# Altium PCB AX309.REV.1.0.PcbDoc (part 8 of 10)
Units mil, origin at the board's own origin, x right, y up, seen from the top; angles counter-clockwise.
Board outline 5185 x 3614 mil, 4 copper layers (Top Layer, GND, Mid-Layer 1, Bottom Layer); 191 components, 352 nets, 1106 pads, 425 vias.
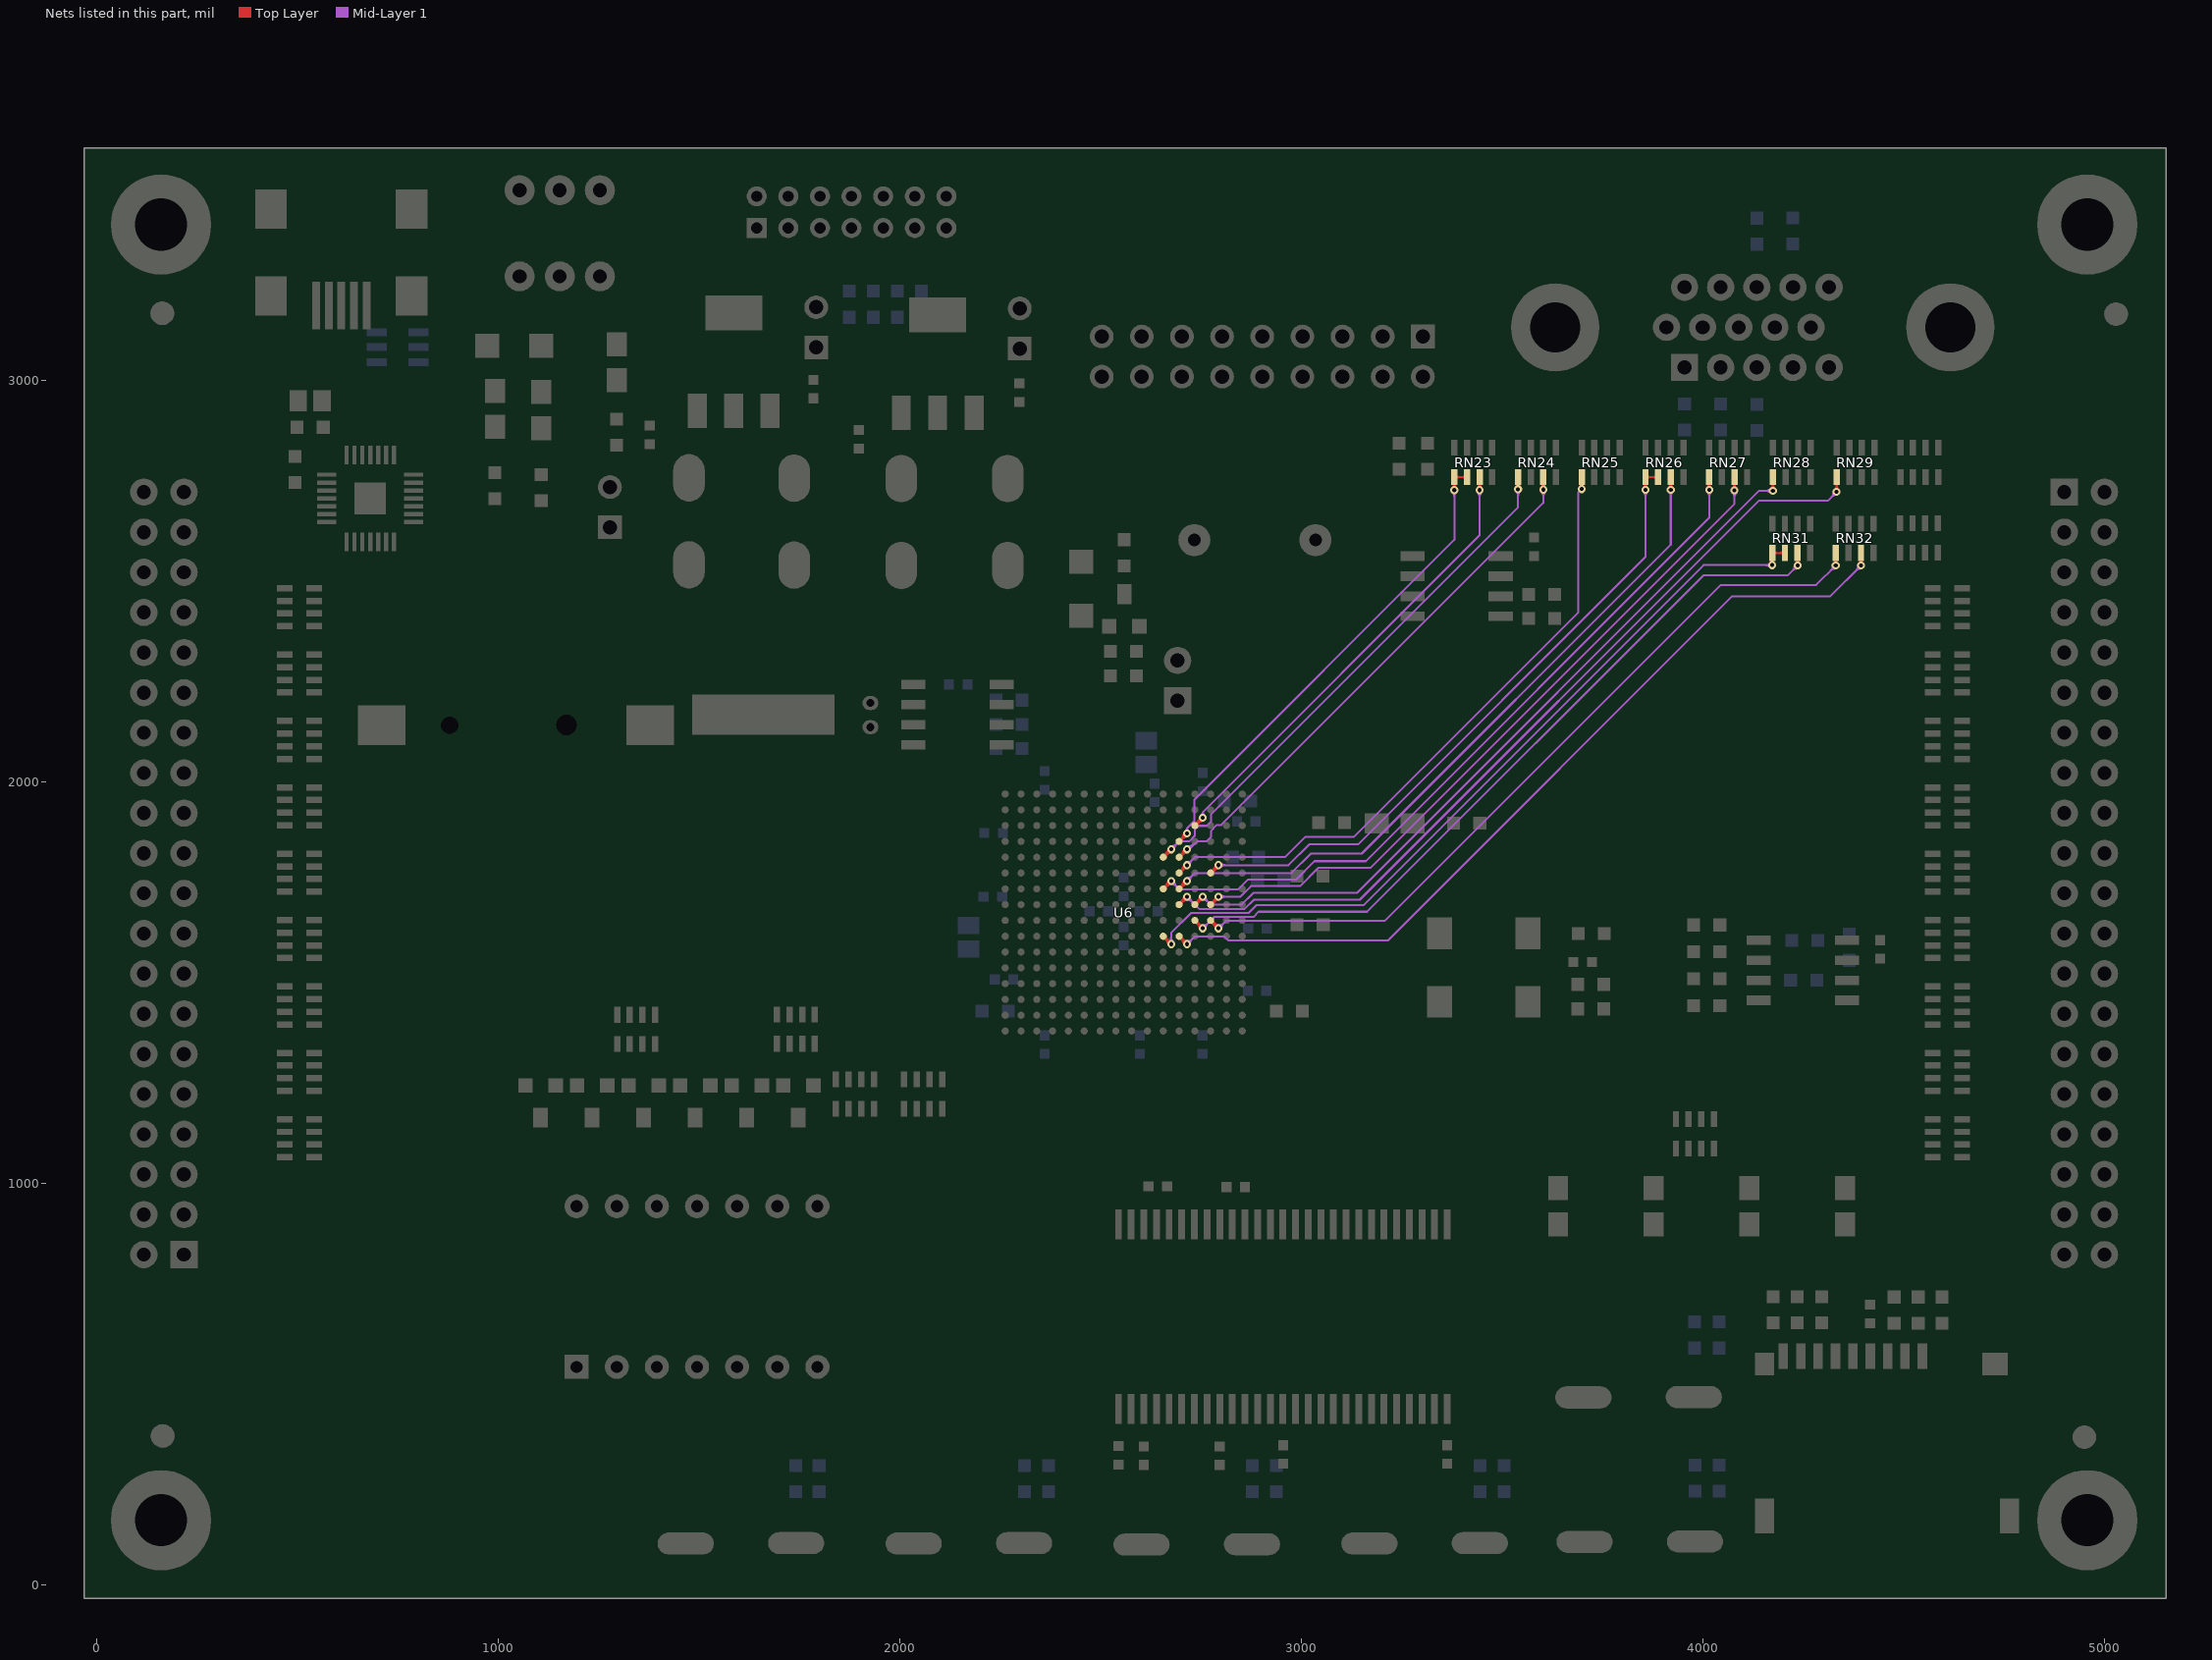
[diagram p10: the nets of this part, all layers, seen from the top]

## Via types
v1: diameter 20, hole 10, Top Layer to Bottom Layer, 328 vias
v2: diameter 30, hole 15, Top Layer to Bottom Layer, 95 vias
v3: diameter 40, hole 20, Top Layer to Bottom Layer, 2 vias

## Nets (pads, with @x,y where several pads share a name; then routed paths per layer and width w, separated by ;. In a path a pad name is that pad's centre, name@x,y a point inside that pad or via, vN(x,y) a via of type N, cw(c..) or ccw(c..) an arc to the next point about the centre after c; other vN are vias at no path point) (continued)
VGAD1: RN32.7 U6.M7 | length 2410.8
  Top Layer w5: U6.M7@2695.8,1608.59 cw(c2695.8,1593.24) 2706.65,1604.09 cw(c2717.5,1614.94) U6.M7@2702.15,1614.94 ; U6.M7@2695.8,1614.94 v1(2715.48,1595.26) ; U6.M7@2698.15,1609 cw(c2688.07,1591.54) v1@2708.05,1594.25 ; U6.M7@2701.74,1612.59 ccw(c2719.2,1622.67) v1@2716.49,1602.69 ; 2705.03,1605.02 cw(c2701.58,1599.04) v1@2708.24,1597.23 ; 2705.72,1605.71 ccw(c2711.7,1609.16) v1@2713.51,1602.5 ; 2706.84,1603.76 ccw(c2717.47,1609.9) v1@2715.82,1597.74 ; 2706.98,1603.9 cw(c2700.84,1593.27) v1@2713,1594.92 ; v1@2707.98,1595.26 ccw(c2689.87,1595.26) 2702.68,1608.06 ccw(c2715.48,1620.87) v1@2715.48,1602.76 ; v1@4389.2,2543.8 ccw(c4376.4,2556.6) 4394.5,2556.6 ccw(c4412.61,2556.6) v1@4399.81,2543.8 ; RN32.7@4390.7,2554.24 cw(c4381.53,2545.07) 4394.5,2545.07 cw(c4407.48,2545.07) RN32.7@4398.3,2554.24 ; v1@4391.89,2545.52 ccw(c4390.96,2548.02) 4393.53,2548.71 ccw(c4397.61,2549.8) v1@4396.49,2545.73 ; v1@4392.52,2545.73 ccw(c4391.4,2549.8) 4395.48,2548.71 ccw(c4398.05,2548.02) v1@4397.12,2545.52 ; v1(4394.5,2538.5) RN32.7@4394.5,2569.85 ; 2707.53,1602.56 cw(c2701.41,1599.03) 2708.24,1597.2 ccw(c2701.41,1599.03) 2707.53,1602.56 ; 2708.18,1603.21 ccw(c2711.71,1609.33) 2713.54,1602.5 cw(c2711.71,1609.33) 2708.18,1603.21
  Mid-Layer 1 w5: v1(2715.48,1595.26) 2734.22,1614 2809,1614 2818,1605 3217,1605 4074,2462 4318.01,2462 v1(4394.5,2538.5) ; v1@2715.48,1602.76 ccw(c2715.48,1620.87) 2728.28,1608.06 ccw(c2741.09,1595.26) v1@2722.98,1595.26 ; v1@4387,2538.5 cw(c4368.9,2538.5) 4381.7,2525.69 cw(c4394.5,2512.89) v1@4394.5,2531
VGAD2: RN32.5 U6.P8 | length 2245.3
  Top Layer w5: U6.P8@2774.54,1647.96 cw(c2774.54,1632.61) 2785.39,1643.46 cw(c2796.24,1654.32) U6.P8@2780.89,1654.32 ; U6.P8@2774.54,1654.32 v1(2794.22,1634.63) ; U6.P8@2776.89,1648.37 cw(c2766.81,1630.91) v1@2786.79,1633.62 ; U6.P8@2780.48,1651.96 ccw(c2797.94,1662.04) v1@2795.23,1642.06 ; 2783.77,1644.39 cw(c2780.32,1638.41) v1@2786.98,1636.6 ; 2784.46,1645.08 ccw(c2790.44,1648.53) v1@2792.25,1641.87 ; 2785.58,1643.13 ccw(c2796.21,1649.27) v1@2794.56,1637.11 ; 2785.72,1643.27 cw(c2779.58,1632.64) v1@2791.74,1634.29 ; v1@2786.72,1634.63 ccw(c2768.61,1634.63) 2781.42,1647.43 ccw(c2794.22,1660.24) v1@2794.22,1642.13 ; v1@4326.21,2543.79 ccw(c4313.41,2556.59) 4331.51,2556.59 ccw(c4349.62,2556.59) v1@4336.82,2543.79 ; RN32.5@4327.71,2554.24 cw(c4318.54,2545.07) 4331.51,2545.07 cw(c4344.49,2545.07) RN32.5@4335.31,2554.24 ; v1@4328.89,2545.52 ccw(c4327.96,2548.01) 4330.54,2548.7 ccw(c4334.62,2549.8) v1@4333.5,2545.72 ; v1@4329.52,2545.72 ccw(c4328.4,2549.8) 4332.49,2548.7 ccw(c4335.06,2548.01) v1@4334.13,2545.52 ; v1(4331.51,2538.49) RN32.5@4331.51,2569.85 ; 2786.27,1641.93 cw(c2780.15,1638.4) 2786.98,1636.57 ccw(c2780.15,1638.4) 2786.27,1641.93 ; 2786.92,1642.58 ccw(c2790.45,1648.7) 2792.28,1641.87 cw(c2790.45,1648.7) 2786.92,1642.58
  Mid-Layer 1 w5: v1(2794.22,1634.63) 2812.59,1653 3208,1653 4045,2490 4283.02,2490 v1(4331.51,2538.49) ; v1@2794.22,1642.13 ccw(c2794.22,1660.24) 2807.02,1647.43 ccw(c2819.83,1634.63) v1@2801.72,1634.63 ; v1@4324.01,2538.49 cw(c4305.91,2538.49) 4318.71,2525.68 cw(c4331.51,2512.88) v1@4331.51,2530.99
VGAD3: RN31.7 U6.N8 | length 2189.7
  Top Layer w5: U6.N8@2735.17,1647.96 cw(c2735.17,1632.61) 2746.02,1643.46 cw(c2756.87,1654.32) U6.N8@2741.52,1654.32 ; U6.N8@2735.17,1654.32 v1(2754.85,1634.63) ; U6.N8@2737.52,1648.37 cw(c2727.44,1630.91) v1@2747.42,1633.62 ; U6.N8@2741.11,1651.96 ccw(c2758.57,1662.04) v1@2755.86,1642.06 ; 2744.4,1644.39 cw(c2740.95,1638.41) v1@2747.61,1636.6 ; 2745.09,1645.08 ccw(c2751.07,1648.53) v1@2752.88,1641.87 ; 2746.21,1643.13 ccw(c2756.84,1649.27) v1@2755.19,1637.11 ; 2746.35,1643.27 cw(c2740.21,1632.64) v1@2752.37,1634.29 ; v1@2747.35,1634.63 ccw(c2729.24,1634.63) 2742.05,1647.43 ccw(c2754.85,1660.24) v1@2754.85,1642.13 ; v1@4231.2,2543.8 ccw(c4218.4,2556.6) 4236.5,2556.6 ccw(c4254.61,2556.6) v1@4241.81,2543.8 ; RN31.7@4232.7,2554.24 cw(c4223.53,2545.07) 4236.5,2545.07 cw(c4249.48,2545.07) RN31.7@4240.3,2554.24 ; v1@4233.89,2545.52 ccw(c4232.96,2548.02) 4235.53,2548.71 ccw(c4239.61,2549.8) v1@4238.49,2545.73 ; v1@4234.52,2545.73 ccw(c4233.4,2549.8) 4237.48,2548.71 ccw(c4240.05,2548.02) v1@4239.12,2545.52 ; v1(4236.5,2538.5) RN31.7@4236.5,2569.85 ; v1@2752.91,1641.87 cw(c2751.08,1648.7) 2747.55,1642.58 ccw(c2751.08,1648.7) v1@2752.91,1641.87 ; 2746.9,1641.93 cw(c2740.78,1638.4) 2747.61,1636.57 ccw(c2740.78,1638.4) 2746.9,1641.93
  Mid-Layer 1 w5: v1(2754.85,1634.63) 2783.22,1663 2881,1663 2894,1676 3164,1676 4002,2514 4212.01,2514 v1(4236.5,2538.5) ; v1@2754.85,1642.13 ccw(c2754.85,1660.24) 2767.65,1647.43 ccw(c2780.46,1634.63) v1@2762.35,1634.63 ; v1@4229,2538.5 cw(c4210.9,2538.5) 4223.7,2525.69 cw(c4236.5,2512.89) v1@4236.5,2531
VGAD4: RN31.5 RN31.6 U6.L7 | length 2293.1
  Top Layer w5: U6.L7@2656.43,1608.59 cw(c2656.43,1593.24) 2667.28,1604.09 cw(c2678.13,1614.94) U6.L7@2662.78,1614.94 ; U6.L7@2656.43,1614.94 v1(2676.11,1595.26) ; U6.L7@2658.78,1609 cw(c2648.7,1591.54) v1@2668.68,1594.25 ; U6.L7@2662.37,1612.59 ccw(c2679.83,1622.67) v1@2677.12,1602.69 ; 2665.66,1605.02 cw(c2662.21,1599.04) v1@2668.87,1597.23 ; 2666.35,1605.71 ccw(c2672.33,1609.16) v1@2674.14,1602.5 ; 2667.47,1603.76 ccw(c2678.1,1609.9) v1@2676.45,1597.74 ; 2667.61,1603.9 cw(c2661.47,1593.27) v1@2673.63,1594.92 ; v1@2668.61,1595.26 ccw(c2650.5,1595.26) 2663.31,1608.06 ccw(c2676.11,1620.87) v1@2676.11,1602.76 ; v1@4168.21,2544.79 ccw(c4155.41,2557.59) 4173.51,2557.59 ccw(c4191.62,2557.59) v1@4178.82,2544.79 ; RN31.5@4169.71,2554.24 cw(c4160.54,2545.07) 4173.51,2545.07 cw(c4186.49,2545.07) RN31.5@4177.31,2554.24 ; v1(4173.51,2539.49) RN31.5@4173.51,2569.85 RN31.6@4205.01,2569.85 ; RN31.5@4177.31,2566.05 cw(c4186.49,2556.88) 4186.49,2569.85 cw(c4186.49,2582.82) RN31.5@4177.31,2573.65 ; RN31.6@4201.21,2566.05 ccw(c4192.03,2556.88) 4192.03,2569.85 ccw(c4192.03,2582.82) RN31.6@4201.21,2573.65 ; v1@2674.17,1602.5 cw(c2672.34,1609.33) 2668.81,1603.21 ccw(c2672.34,1609.33) v1@2674.17,1602.5 ; 2668.16,1602.56 cw(c2662.04,1599.03) 2668.87,1597.2 ccw(c2662.04,1599.03) 2668.16,1602.56
  Mid-Layer 1 w5: v1@2670.81,1600.56 ccw(c2658,1613.37) 2676.11,1613.37 ccw(c2694.22,1613.37) v1@2681.41,1600.56 ; v1(2676.11,1595.26) 2676.11,1623.11 2726,1673 2869,1673 2888,1692 3155,1692 4002.49,2539.49 v1(4173.51,2539.49) ; v1@4168.21,2534.18 ccw(c4155.41,2521.38) 4155.41,2539.49 ccw(c4155.41,2557.59) v1@4168.21,2544.79
VGAD5: RN29.5 U6.M9 | length 2383.6
  Top Layer w5: U6.M9@2695.8,1693.68 v1(2715.48,1713.37) ; U6.M9@2695.8,1700.04 ccw(c2695.8,1715.39) 2706.65,1704.54 ccw(c2717.5,1693.68) U6.M9@2702.15,1693.68 ; U6.M9@2698.15,1699.63 ccw(c2688.07,1717.09) v1@2708.05,1714.38 ; U6.M9@2701.74,1696.04 cw(c2719.2,1685.96) v1@2716.49,1705.94 ; 2705.03,1703.61 ccw(c2701.58,1709.59) v1@2708.24,1711.4 ; 2705.72,1702.92 cw(c2711.7,1699.47) v1@2713.51,1706.13 ; 2706.84,1704.87 cw(c2717.47,1698.73) v1@2715.82,1710.89 ; 2706.98,1704.73 ccw(c2700.84,1715.36) v1@2713,1713.71 ; v1@2707.98,1713.37 cw(c2689.87,1713.37) 2702.68,1700.57 cw(c2715.48,1687.76) v1@2715.48,1705.87 ; v1@4328.49,2727.51 ccw(c4315.69,2740.31) 4333.8,2740.31 ccw(c4351.9,2740.31) v1@4339.1,2727.51 ; RN29.5@4330,2743.24 cw(c4320.82,2734.07) 4333.8,2734.07 cw(c4346.77,2734.07) RN29.5@4337.6,2743.24 ; v1(4333.8,2722.2) RN29.5@4333.8,2758.85 ; 2707.53,1706.07 ccw(c2701.41,1709.6) 2708.24,1711.43 cw(c2701.41,1709.6) 2707.53,1706.07 ; 2708.18,1705.42 cw(c2711.71,1699.3) 2713.54,1706.13 ccw(c2711.71,1699.3) 2708.18,1705.42
  Mid-Layer 1 w5: v1@2715.48,1705.87 cw(c2715.48,1687.76) 2728.28,1700.57 cw(c2741.09,1713.37) v1@2722.98,1713.37 ; v1(2715.48,1713.37) 2745.85,1683 2859,1683 2882,1706 3146,1706 4140,2700 4311.59,2700 v1(4333.8,2722.2) ; v1@4326.3,2722.2 cw(c4308.19,2722.2) 4320.99,2709.4 cw(c4333.8,2696.6) v1@4333.8,2714.7
VGAD6: RN28.5 U6.N9 | length 2199.6
  Top Layer w5: U6.N9@2735.17,1693.68 v1(2754.85,1713.37) ; U6.N9@2735.17,1700.04 ccw(c2735.17,1715.39) 2746.02,1704.54 ccw(c2756.87,1693.68) U6.N9@2741.52,1693.68 ; U6.N9@2737.52,1699.63 ccw(c2727.44,1717.09) v1@2747.42,1714.38 ; U6.N9@2741.11,1696.04 cw(c2758.57,1685.96) v1@2755.86,1705.94 ; 2744.4,1703.61 ccw(c2740.95,1709.59) v1@2747.61,1711.4 ; 2745.09,1702.92 cw(c2751.07,1699.47) v1@2752.88,1706.13 ; 2746.21,1704.87 cw(c2756.84,1698.73) v1@2755.19,1710.89 ; 2746.35,1704.73 ccw(c2740.21,1715.36) v1@2752.37,1713.71 ; v1@2747.35,1713.37 cw(c2729.24,1713.37) 2742.05,1700.57 cw(c2754.85,1687.76) v1@2754.85,1705.87 ; v1@4169.78,2730.22 ccw(c4156.98,2743.02) 4175.08,2743.02 ccw(c4193.19,2743.02) v1@4180.39,2730.22 ; RN28.5@4171.28,2743.24 cw(c4162.11,2734.07) 4175.08,2734.07 cw(c4188.06,2734.07) RN28.5@4178.88,2743.24 ; v1@4171.71,2731.62 ccw(c4168.19,2738.62) 4175.76,2736.59 ccw(c4179.7,2735.54) v1@4178.07,2731.8 ; v1@4172.09,2731.8 ccw(c4170.47,2735.54) 4174.41,2736.59 ccw(c4181.98,2738.62) v1@4178.45,2731.62 ; v1(4175.08,2724.92) RN28.5@4175.08,2758.85 ; v1@2752.91,1706.13 ccw(c2751.08,1699.3) 2747.55,1705.42 cw(c2751.08,1699.3) v1@2752.91,1706.13 ; 2746.9,1706.07 ccw(c2740.78,1709.6) 2747.61,1711.43 cw(c2740.78,1709.6) 2746.9,1706.07
  Mid-Layer 1 w5: v1@2754.85,1705.87 cw(c2754.85,1687.76) 2767.65,1700.57 cw(c2780.46,1713.37) v1@2762.35,1713.37 ; v1(2754.85,1713.37) 2774.22,1694 2852,1694 2881,1723 3139,1723 4140.92,2724.92 v1(4175.08,2724.92) ; v1@4169.78,2719.61 ccw(c4156.98,2706.81) 4156.98,2724.92 ccw(c4156.98,2743.02) v1@4169.78,2730.22
VGAD7: RN27.7 U6.P9 | length 2065.3
  Top Layer w5: U6.P9@2774.54,1693.68 v1(2794.22,1713.37) ; U6.P9@2774.54,1700.04 ccw(c2774.54,1715.39) 2785.39,1704.54 ccw(c2796.24,1693.68) U6.P9@2780.89,1693.68 ; U6.P9@2776.89,1699.63 ccw(c2766.81,1717.09) v1@2786.79,1714.38 ; U6.P9@2780.48,1696.04 cw(c2797.94,1685.96) v1@2795.23,1705.94 ; 2783.77,1703.61 ccw(c2780.32,1709.59) v1@2786.98,1711.4 ; 2784.46,1702.92 cw(c2790.44,1699.47) v1@2792.25,1706.13 ; 2785.58,1704.87 cw(c2796.21,1698.73) v1@2794.56,1710.89 ; 2785.72,1704.73 ccw(c2779.58,1715.36) v1@2791.74,1713.71 ; v1@2786.72,1713.37 cw(c2768.61,1713.37) 2781.42,1700.57 cw(c2794.22,1687.76) v1@2794.22,1705.87 ; v1@4074.06,2730.94 ccw(c4061.25,2743.75) 4079.36,2743.75 ccw(c4097.47,2743.75) v1@4084.66,2730.94 ; RN27.7@4075.56,2743.24 cw(c4066.39,2734.07) 4079.36,2734.07 cw(c4092.33,2734.07) RN27.7@4083.16,2743.24 ; v1@4076.35,2732.51 ccw(c4073.66,2738.64) 4080.12,2736.9 ccw(c4083.67,2735.95) v1@4082.25,2732.56 ; v1@4076.47,2732.56 ccw(c4075.05,2735.95) 4078.6,2736.9 ccw(c4085.07,2738.64) v1@4082.38,2732.51 ; v1(4079.36,2725.64) RN27.7@4079.36,2758.85 ; 2786.27,1706.07 ccw(c2780.15,1709.6) 2786.98,1711.43 cw(c2780.15,1709.6) 2786.27,1706.07 ; 2786.92,1705.42 cw(c2790.45,1699.3) 2792.28,1706.13 ccw(c2790.45,1699.3) 2786.92,1705.42
  Mid-Layer 1 w5: v1(2794.22,1713.37) 2848.37,1713.37 2875,1740 2997,1740 3042,1785 3172,1785 4079.36,2692.36 v1(4079.36,2725.64) ; v1@2799.52,1708.07 cw(c2812.33,1695.26) 2812.33,1713.37 cw(c2812.33,1731.48) v1@2799.52,1718.67 ; v1@4074.06,2720.34 cw(c4061.25,2707.53) 4079.36,2707.53 cw(c4097.47,2707.53) v1@4084.66,2720.34
VGAD8: RN27.5 U6.L10 | length 2136.3
  Top Layer w5: U6.L10@2656.43,1733.06 v1(2676.11,1752.74) ; U6.L10@2656.43,1739.41 ccw(c2656.43,1754.76) 2667.28,1743.91 ccw(c2678.13,1733.06) U6.L10@2662.78,1733.06 ; U6.L10@2658.78,1739 ccw(c2648.7,1756.46) v1@2668.68,1753.75 ; U6.L10@2662.37,1735.41 cw(c2679.83,1725.33) v1@2677.12,1745.31 ; 2665.66,1742.98 ccw(c2662.21,1748.96) v1@2668.87,1750.77 ; 2666.35,1742.29 cw(c2672.33,1738.84) v1@2674.14,1745.5 ; 2667.47,1744.24 cw(c2678.1,1738.1) v1@2676.45,1750.26 ; 2667.61,1744.1 ccw(c2661.47,1754.73) v1@2673.63,1753.08 ; v1@2668.61,1752.74 cw(c2650.5,1752.74) 2663.31,1739.94 cw(c2676.11,1727.13) v1@2676.11,1745.24 ; v1@4011.07,2732.67 ccw(c3998.26,2745.48) 4016.37,2745.48 ccw(c4034.48,2745.48) v1@4021.67,2732.67 ; RN27.5@4012.57,2743.24 cw(c4003.39,2734.07) 4016.37,2734.07 cw(c4029.34,2734.07) RN27.5@4020.17,2743.24 ; v1@4013.73,2734.39 ccw(c4012.77,2736.95) 4015.41,2737.65 ccw(c4019.63,2738.78) v1@4018.43,2734.58 ; v1@4014.31,2734.58 ccw(c4013.11,2738.78) 4017.33,2737.65 ccw(c4019.97,2736.95) v1@4019.01,2734.39 ; v1(4016.37,2727.37) RN27.5@4016.37,2758.85 ; v1@2674.17,1745.5 ccw(c2672.34,1738.67) 2668.81,1744.79 cw(c2672.34,1738.67) v1@2674.17,1745.5 ; 2668.16,1745.44 ccw(c2662.04,1748.97) 2668.87,1750.8 cw(c2662.04,1748.97) 2668.16,1745.44
  Mid-Layer 1 w5: v1@2676.11,1745.24 cw(c2676.11,1727.13) 2688.91,1739.94 cw(c2701.72,1752.74) v1@2683.61,1752.74 ; v1(2676.11,1752.74) 2696.85,1732 2843,1732 2867,1756 2987,1756 3033,1802 3161,1802 4016.37,2657.37 v1(4016.37,2727.37) ; v1@4011.07,2722.07 cw(c3998.26,2709.26) 4016.37,2709.26 cw(c4034.48,2709.26) v1@4021.67,2722.07
VGAD9: RN26.7 U6.M10 | length 2023.2
  Top Layer w5: U6.M10@2695.8,1733.06 v1(2715.48,1752.74) ; U6.M10@2695.8,1739.41 ccw(c2695.8,1754.76) 2706.65,1743.91 ccw(c2717.5,1733.06) U6.M10@2702.15,1733.06 ; U6.M10@2698.15,1739 ccw(c2688.07,1756.46) v1@2708.05,1753.75 ; U6.M10@2701.74,1735.41 cw(c2719.2,1725.33) v1@2716.49,1745.31 ; 2705.03,1742.98 ccw(c2701.58,1748.96) v1@2708.24,1750.77 ; 2705.72,1742.29 cw(c2711.7,1738.84) v1@2713.51,1745.5 ; 2706.84,1744.24 cw(c2717.47,1738.1) v1@2715.82,1750.26 ; 2706.98,1744.1 ccw(c2700.84,1754.73) v1@2713,1753.08 ; v1@2707.98,1752.74 cw(c2689.87,1752.74) 2702.68,1739.94 cw(c2715.48,1727.13) v1@2715.48,1745.24 ; v1@3915.34,2732.66 ccw(c3902.54,2745.46) 3920.65,2745.46 ccw(c3938.75,2745.46) v1@3925.95,2732.66 ; RN26.7@3916.85,2743.24 cw(c3907.67,2734.07) 3920.65,2734.07 cw(c3933.62,2734.07) RN26.7@3924.45,2743.24 ; v1@3918.01,2734.37 ccw(c3917.04,2736.94) 3919.69,2737.65 ccw(c3923.93,2738.78) v1@3922.72,2734.56 ; v1@3918.58,2734.56 ccw(c3917.37,2738.78) 3921.61,2737.65 ccw(c3924.25,2736.94) v1@3923.29,2734.37 ; v1(3920.65,2727.35) RN26.7@3920.65,2758.85 ; 2707.53,1745.44 ccw(c2701.41,1748.97) 2708.24,1750.8 cw(c2701.41,1748.97) 2707.53,1745.44 ; 2708.18,1744.79 cw(c2711.71,1738.67) 2713.54,1745.5 ccw(c2711.71,1738.67) 2708.18,1744.79
  Mid-Layer 1 w5: v1(2715.48,1752.74) 2735.17,1772.43 2774.54,1772.43 2975.43,1772.43 3024,1821 3151,1821 3920.65,2590.65 v1(3920.65,2727.35) ; v1@2715.48,1760.24 ccw(c2715.48,1778.35) 2728.28,1765.54 ccw(c2741.09,1752.74) v1@2722.98,1752.74 ; v1@3915.34,2722.05 cw(c3902.54,2709.25) 3920.65,2709.25 cw(c3938.75,2709.25) v1@3925.95,2722.05
VGAD10: RN26.5 RN26.6 U6.P11 | length 1961.1
  Top Layer w5: U6.P11@2774.54,1772.43 v1(2794.22,1792.11) ; U6.P11@2774.54,1778.78 ccw(c2774.54,1794.13) 2785.39,1783.28 ccw(c2796.24,1772.43) U6.P11@2780.89,1772.43 ; U6.P11@2776.89,1778.37 ccw(c2766.81,1795.83) v1@2786.79,1793.12 ; U6.P11@2780.48,1774.78 cw(c2797.94,1764.7) v1@2795.23,1784.68 ; 2783.77,1782.35 ccw(c2780.32,1788.33) v1@2786.98,1790.14 ; 2784.46,1781.66 cw(c2790.44,1778.21) v1@2792.25,1784.87 ; 2785.58,1783.61 cw(c2796.21,1777.47) v1@2794.56,1789.63 ; 2785.72,1783.47 ccw(c2779.58,1794.1) v1@2791.74,1792.45 ; v1@2786.72,1792.11 cw(c2768.61,1792.11) 2781.42,1779.31 cw(c2794.22,1766.5) v1@2794.22,1784.61 ; v1@3852.35,2732.65 ccw(c3839.55,2745.45) 3857.65,2745.45 ccw(c3875.76,2745.45) v1@3862.96,2732.65 ; RN26.5@3853.85,2743.24 cw(c3844.68,2734.07) 3857.65,2734.07 cw(c3870.63,2734.07) RN26.5@3861.45,2743.24 ; v1@3855.01,2734.36 ccw(c3854.05,2736.93) 3856.7,2737.64 ccw(c3860.94,2738.78) v1@3859.73,2734.55 ; v1@3855.58,2734.55 ccw(c3854.36,2738.78) 3858.61,2737.64 ccw(c3861.26,2736.93) v1@3860.3,2734.36 ; v1(3857.65,2727.35) RN26.5@3857.65,2758.85 ; RN26.5@3861.45,2755.05 cw(c3870.63,2745.88) 3870.63,2758.85 cw(c3870.63,2771.82) RN26.5@3861.45,2762.65 ; RN26.5@3862.51,2758.85 RN26.6@3889.15,2758.85 RN26.6@3894.01,2758.85 ; RN26.6@3885.35,2755.05 ccw(c3876.18,2745.88) 3876.18,2758.85 ccw(c3876.18,2771.82) RN26.6@3885.35,2762.65 ; v1@2786.98,1790.17 cw(c2780.15,1788.34) 2786.27,1784.81 ccw(c2780.15,1788.34) v1@2786.98,1790.17 ; 2786.92,1784.16 cw(c2790.45,1778.04) 2792.28,1784.87 ccw(c2790.45,1778.04) 2786.92,1784.16
  Mid-Layer 1 w5: v1@2798.11,1796 v1(2794.22,1792.11) 2968.11,1792.11 3020,1844 3142,1844 3857.65,2559.65 v1(3857.65,2727.35) ; v1@2799.52,1786.81 cw(c2812.33,1774) 2812.33,1792.11 cw(c2812.33,1810.22) v1@2799.52,1797.41 ; v1@3852.35,2722.04 cw(c3839.55,2709.24) 3857.65,2709.24 cw(c3875.76,2709.24) v1@3862.96,2722.04
VGAD11: RN25.5 U6.M11 | length 1833
  Top Layer w5: U6.M11@2695.8,1772.43 v1(2715.37,1792) ; U6.M11@2695.8,1778.78 ccw(c2695.8,1794.13) 2706.65,1783.28 ccw(c2717.5,1772.43) U6.M11@2702.15,1772.43 ; U6.M11@2698.17,1778.39 ccw(c2688.24,1795.59) v1@2707.93,1792.98 ; U6.M11@2701.76,1774.8 cw(c2718.96,1764.87) v1@2716.35,1784.56 ; 2705.05,1782.36 ccw(c2701.71,1788.16) v1@2708.15,1789.97 ; 2705.73,1781.68 cw(c2711.53,1778.34) v1@2713.34,1784.78 ; 2706.83,1783.59 cw(c2717.28,1777.56) v1@2715.7,1789.52 ; 2706.96,1783.46 ccw(c2700.93,1793.91) v1@2712.89,1792.33 ; v1@2707.87,1792 cw(c2689.76,1792) 2702.57,1779.2 cw(c2715.37,1766.39) v1@2715.37,1784.5 ; v1@3693.64,2734.36 ccw(c3680.83,2747.17) 3698.94,2747.17 ccw(c3717.05,2747.17) v1@3704.24,2734.36 ; RN25.5@3695.14,2743.24 cw(c3685.97,2734.07) 3698.94,2734.07 cw(c3711.91,2734.07) RN25.5@3702.74,2743.24 ; v1(3698.94,2729.06) RN25.5@3698.94,2758.85 ; 2707.41,1784.59 ccw(c2701.16,1788.19) 2708.13,1790.06 cw(c2701.16,1788.19) 2707.41,1784.59 ; 2707.96,1784.04 cw(c2711.56,1777.79) 2713.43,1784.76 ccw(c2711.56,1777.79) 2707.96,1784.04
  Mid-Layer 1 w5: v1(2715.37,1792) 2735.37,1812 2960,1812 3010,1862 3131,1862 3690,2421 3690,2720.12 v1(3698.94,2729.06) ; v1@2715.37,1799.5 ccw(c2715.37,1817.61) 2728.17,1804.8 ccw(c2740.98,1792) v1@2722.87,1792
VGAD12: RN24.7 U6.M12 | length 1617.4
  Top Layer w5: U6.M12@2695.8,1811.8 v1(2715.48,1831.48) ; U6.M12@2695.8,1818.15 ccw(c2695.8,1833.5) 2706.65,1822.65 ccw(c2717.5,1811.8) U6.M12@2702.15,1811.8 ; U6.M12@2698.15,1817.74 ccw(c2688.07,1835.2) v1@2708.05,1832.49 ; U6.M12@2701.74,1814.15 cw(c2719.2,1804.07) v1@2716.49,1824.05 ; 2705.03,1821.72 ccw(c2701.58,1827.7) v1@2708.24,1829.51 ; 2705.72,1821.03 cw(c2711.7,1817.58) v1@2713.51,1824.24 ; 2706.84,1822.98 cw(c2717.47,1816.84) v1@2715.82,1829 ; 2706.98,1822.84 ccw(c2700.84,1833.47) v1@2713,1831.82 ; v1@2707.98,1831.48 cw(c2689.87,1831.48) 2702.68,1818.68 cw(c2715.48,1805.87) v1@2715.48,1823.98 ; v1@3597.91,2733.09 ccw(c3585.11,2745.89) 3603.22,2745.89 ccw(c3621.32,2745.89) v1@3608.52,2733.09 ; RN24.7@3599.42,2743.24 cw(c3590.24,2734.07) 3603.22,2734.07 cw(c3616.19,2734.07) RN24.7@3607.02,2743.24 ; v1(3603.22,2727.78) RN24.7@3603.22,2758.85 ; 2707.53,1824.18 ccw(c2701.41,1827.71) 2708.24,1829.54 cw(c2701.41,1827.71) 2707.53,1824.18 ; 2708.18,1823.53 cw(c2711.71,1817.41) 2713.54,1824.24 ccw(c2711.71,1817.41) 2708.18,1823.53
  Mid-Layer 1 w5: v1(2715.48,1831.48) 2721.48,1831.48 2742,1852 2765,1852 2775,1862 2775,1877 2790,1892 2801,1892 3603.22,2694.22 v1(3603.22,2727.78) ; v1@2715.48,1833.98 ccw(c2715.48,1854.5) 2729.99,1839.99 ; v1@2715.48,1838.98 ccw(c2715.48,1871.57) 2738.53,1848.53 ; v1@3597.91,2722.48 cw(c3585.11,2709.68) 3603.22,2709.68 cw(c3621.32,2709.68) v1@3608.52,2722.48
VGAD13: RN24.5 U6.L12 | length 1597.5
  Top Layer w5: U6.L12@2656.43,1811.8 v1(2676.11,1831.48) ; U6.L12@2656.43,1818.15 ccw(c2656.43,1833.5) 2667.28,1822.65 ccw(c2678.13,1811.8) U6.L12@2662.78,1811.8 ; U6.L12@2658.78,1817.74 ccw(c2648.7,1835.2) v1@2668.68,1832.49 ; U6.L12@2662.37,1814.15 cw(c2679.83,1804.07) v1@2677.12,1824.05 ; 2665.66,1821.72 ccw(c2662.21,1827.7) v1@2668.87,1829.51 ; 2666.35,1821.03 cw(c2672.33,1817.58) v1@2674.14,1824.24 ; 2667.47,1822.98 cw(c2678.1,1816.84) v1@2676.45,1829 ; 2667.61,1822.84 ccw(c2661.47,1833.47) v1@2673.63,1831.82 ; v1@2668.61,1831.48 cw(c2650.5,1831.48) 2663.31,1818.68 cw(c2676.11,1805.87) v1@2676.11,1823.98 ; v1@3534.92,2734.08 ccw(c3522.12,2746.88) 3540.23,2746.88 ccw(c3558.33,2746.88) v1@3545.53,2734.08 ; RN24.5@3536.43,2743.24 cw(c3527.25,2734.07) 3540.23,2734.07 cw(c3553.2,2734.07) RN24.5@3544.03,2743.24 ; v1(3540.23,2728.77) RN24.5@3540.23,2758.85 ; v1@2674.17,1824.24 ccw(c2672.34,1817.41) 2668.81,1823.53 cw(c2672.34,1817.41) v1@2674.17,1824.24 ; 2668.16,1824.18 ccw(c2662.04,1827.71) 2668.87,1829.54 cw(c2662.04,1827.71) 2668.16,1824.18
  Mid-Layer 1 w5: v1(2676.11,1831.48) 2695.63,1851 2721,1851 2735,1865 2735,1880 2745,1890 2765,1890 2775,1900 2775,1918 3540.23,2683.23 v1(3540.23,2728.77) ; v1@2676.11,1838.98 ccw(c2676.11,1857.09) 2688.91,1844.28 ccw(c2701.72,1831.48) v1@2683.61,1831.48 ; v1@3534.92,2723.47 cw(c3522.12,2710.67) 3540.23,2710.67 cw(c3558.33,2710.67) v1@3545.53,2723.47
VGAD14: RN23.7 U6.N14 | length 1428.7
  Top Layer w5: U6.N14@2735.17,1890.54 v1(2754.85,1910.22) ; U6.N14@2735.17,1896.89 ccw(c2735.17,1912.24) 2746.02,1901.39 ccw(c2756.87,1890.54) U6.N14@2741.52,1890.54 ; U6.N14@2737.52,1896.48 ccw(c2727.44,1913.94) v1@2747.42,1911.23 ; U6.N14@2741.11,1892.89 cw(c2758.57,1882.81) v1@2755.86,1902.79 ; 2744.4,1900.46 ccw(c2740.95,1906.44) v1@2747.61,1908.25 ; 2745.09,1899.77 cw(c2751.07,1896.32) v1@2752.88,1902.98 ; 2746.21,1901.72 cw(c2756.84,1895.58) v1@2755.19,1907.74 ; 2746.35,1901.58 ccw(c2740.21,1912.21) v1@2752.37,1910.56 ; v1@2747.35,1910.22 cw(c2729.24,1910.22) 2742.05,1897.42 cw(c2754.85,1884.61) v1@2754.85,1902.72 ; v1@3439.2,2731.8 ccw(c3426.4,2744.6) 3444.5,2744.6 ccw(c3462.61,2744.6) v1@3449.81,2731.8 ; RN23.7@3440.7,2743.24 cw(c3431.53,2734.07) 3444.5,2734.07 cw(c3457.48,2734.07) RN23.7@3448.3,2743.24 ; v1@3441.73,2733.46 ccw(c3440.55,2736.44) 3443.64,2737.27 ; v1@3441.94,2733.55 ccw(c3440.08,2738.69) 3445.36,2737.27 ; 3443.64,2737.27 ccw(c3448.93,2738.69) v1@3447.06,2733.55 ; v1(3444.5,2726.5) RN23.7@3444.5,2758.85 ; 3445.36,2737.27 ccw(c3448.46,2736.44) v1@3447.28,2733.46 ; v1@2752.91,1902.98 ccw(c2751.08,1896.15) 2747.55,1902.27 cw(c2751.08,1896.15) v1@2752.91,1902.98 ; 2746.9,1902.92 ccw(c2740.78,1906.45) 2747.61,1908.28 cw(c2740.78,1906.45) 2746.9,1902.92
  Mid-Layer 1 w5: v1@2750.84,1916.56 ccw(c2746.22,1923.85) 2754.85,1923.85 ; v1(2754.85,1910.22) 2754.85,1923.85 ; v1@2758.86,1916.56 cw(c2763.49,1923.85) 2754.85,1923.85 ; v1@3439.2,2721.19 cw(c3426.4,2708.39) 3444.5,2708.39 cw(c3462.61,2708.39) v1@3449.81,2721.19 ; v1(3444.5,2726.5) 3444.5,2613.5 2754.85,1923.85
VGAD15: RN23.5 RN23.6 U6.M13 | length 1527.9
  Top Layer w5: U6.M13@2695.8,1851.17 v1(2715.48,1870.85) ; U6.M13@2695.8,1857.52 ccw(c2695.8,1872.87) 2706.65,1862.02 ccw(c2717.5,1851.17) U6.M13@2702.15,1851.17 ; U6.M13@2698.15,1857.11 ccw(c2688.07,1874.57) v1@2708.05,1871.86 ; U6.M13@2701.74,1853.52 cw(c2719.2,1843.44) v1@2716.49,1863.42 ; 2705.03,1861.09 ccw(c2701.58,1867.07) v1@2708.24,1868.88 ; 2705.72,1860.4 cw(c2711.7,1856.95) v1@2713.51,1863.61 ; 2706.84,1862.35 cw(c2717.47,1856.21) v1@2715.82,1868.37 ; 2706.98,1862.21 ccw(c2700.84,1872.84) v1@2713,1871.19 ; v1@2707.98,1870.85 cw(c2689.87,1870.85) 2702.68,1858.05 cw(c2715.48,1845.24) v1@2715.48,1863.35 ; v1@3376.21,2731.79 ccw(c3363.41,2744.59) 3381.51,2744.59 ccw(c3399.62,2744.59) v1@3386.82,2731.79 ; RN23.5@3377.71,2743.24 cw(c3368.54,2734.07) 3381.51,2734.07 cw(c3394.49,2734.07) RN23.5@3385.31,2743.24 ; v1@3378.74,2733.46 ccw(c3377.55,2736.44) 3380.65,2737.27 ccw(c3385.95,2738.69) v1@3384.08,2733.54 ; v1@3378.95,2733.54 ccw(c3377.07,2738.69) 3382.37,2737.27 ccw(c3385.47,2736.44) v1@3384.28,2733.46 ; v1(3381.51,2726.49) RN23.5@3381.51,2758.85 RN23.6@3413.01,2758.85 ; RN23.5@3385.31,2755.05 cw(c3394.49,2745.88) 3394.49,2758.85 cw(c3394.49,2771.82) RN23.5@3385.31,2762.65 ; RN23.6@3409.21,2755.05 ccw(c3400.03,2745.88) 3400.03,2758.85 ccw(c3400.03,2771.82) RN23.6@3409.21,2762.65 ; v1@2708.24,1868.91 cw(c2701.41,1867.08) 2707.53,1863.55 ccw(c2701.41,1867.08) v1@2708.24,1868.91 ; 2708.18,1862.9 cw(c2711.71,1856.78) 2713.54,1863.61 ccw(c2711.71,1856.78) 2708.18,1862.9
  Mid-Layer 1 w5: v1@2711.89,1877.44 ccw(c2708.6,1883.48) 2715.48,1883.48 ; v1(2715.48,1870.85) 2715.48,1883.48 ; v1@2719.07,1877.44 cw(c2722.36,1883.48) 2715.48,1883.48 ; v1@3376.21,2721.18 cw(c3363.41,2708.38) 3381.51,2708.38 cw(c3399.62,2708.38) v1@3386.82,2721.18 ; v1(3381.51,2726.49) 3381.51,2602.51 2734,1955 2734,1902 2715.48,1883.48
pads on no net: Designator13_2_1.1 Designator13_2_1_1.1 Designator13_2_1_2.1 Designator13_2_1_3.1 Designator17_2_1.1 Designator17_2_1_1.1 Designator17_2_1_2.1 Designator17_2_1_3.1 J1.4 J1.6 J1.7 J1.8 J1.9 J4.4 J4.9 J4.11 J4.12 J4.15 J4.16 J4.17 P5.12 P5.14 RN9.3 RN9.4 RN9.5 RN9.6 RN11.1 RN11.2 RN11.7 RN11.8 RN19.3 RN19.4 RN19.5 RN19.6 RN23.1 RN23.8 RN24.3 RN24.6 RN26.1 RN26.8 RN27.3 RN27.6 RN31.1 RN31.8 RN32.3 RN32.6 SW1.1 SW1.4 U2.4 U2.6 U4.0 U4.1 U4.2 U4.10 U4.11 U4.12 U4.13 U4.14 U4.15 U4.16 U4.17 U4.18 U4.19 U4.20 U4.21 U4.22 U4.23 U4.24 U4.27 U4.28 U6.K11 U9.40 U10.0 U14.10
copper on no net: | length 129806.3